# EAGLE board imu_can (EAGLE 4.11)
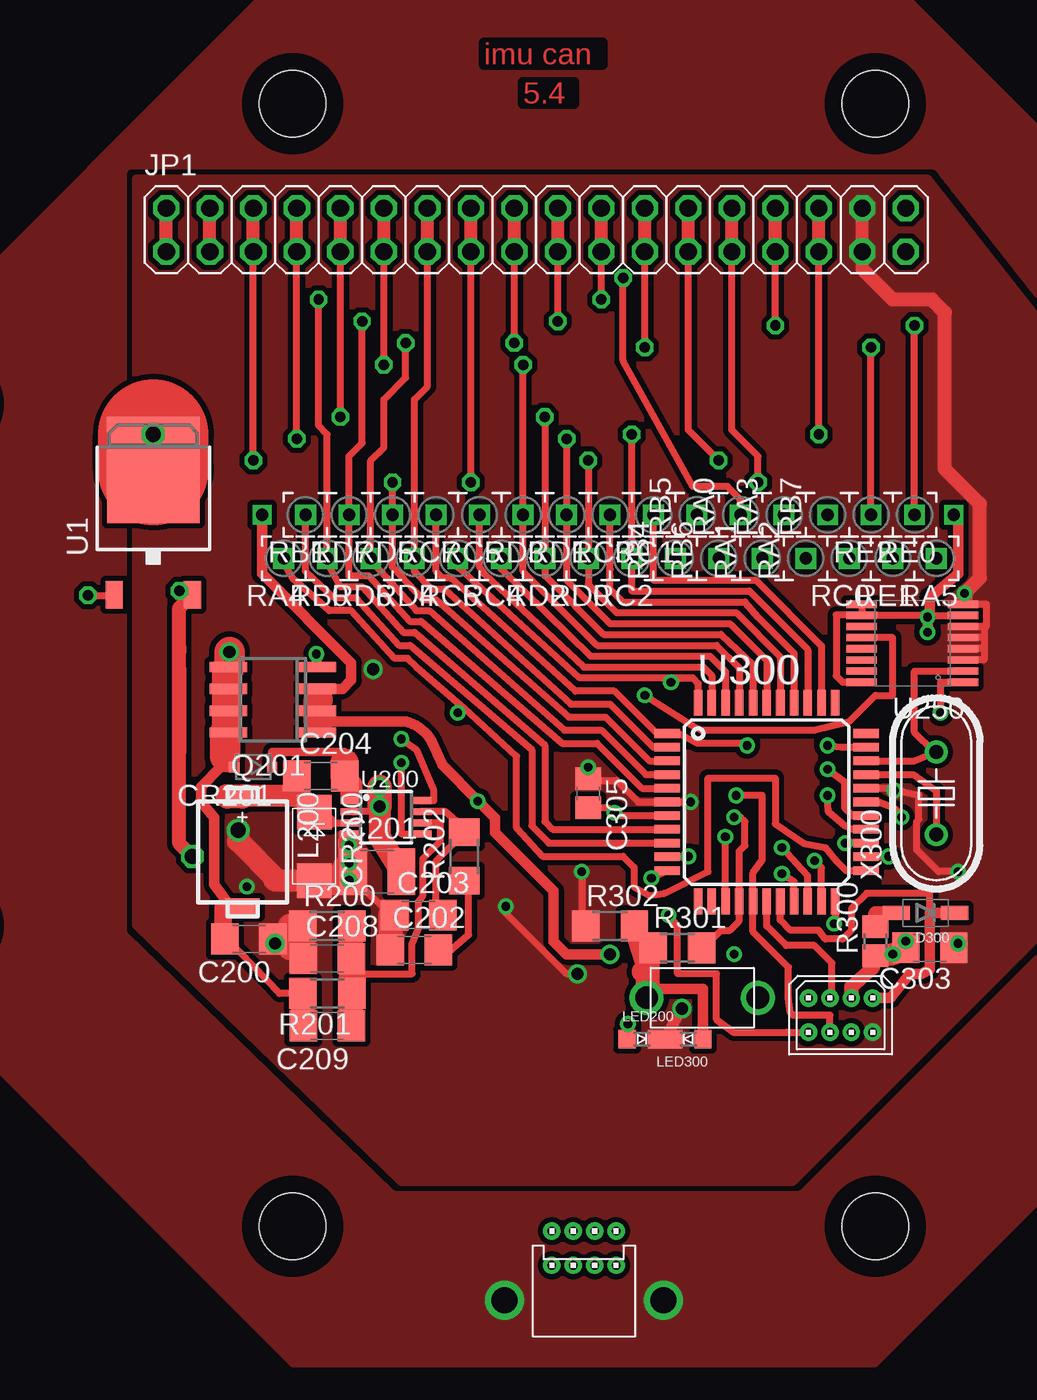
[diagram p0: board, top side]
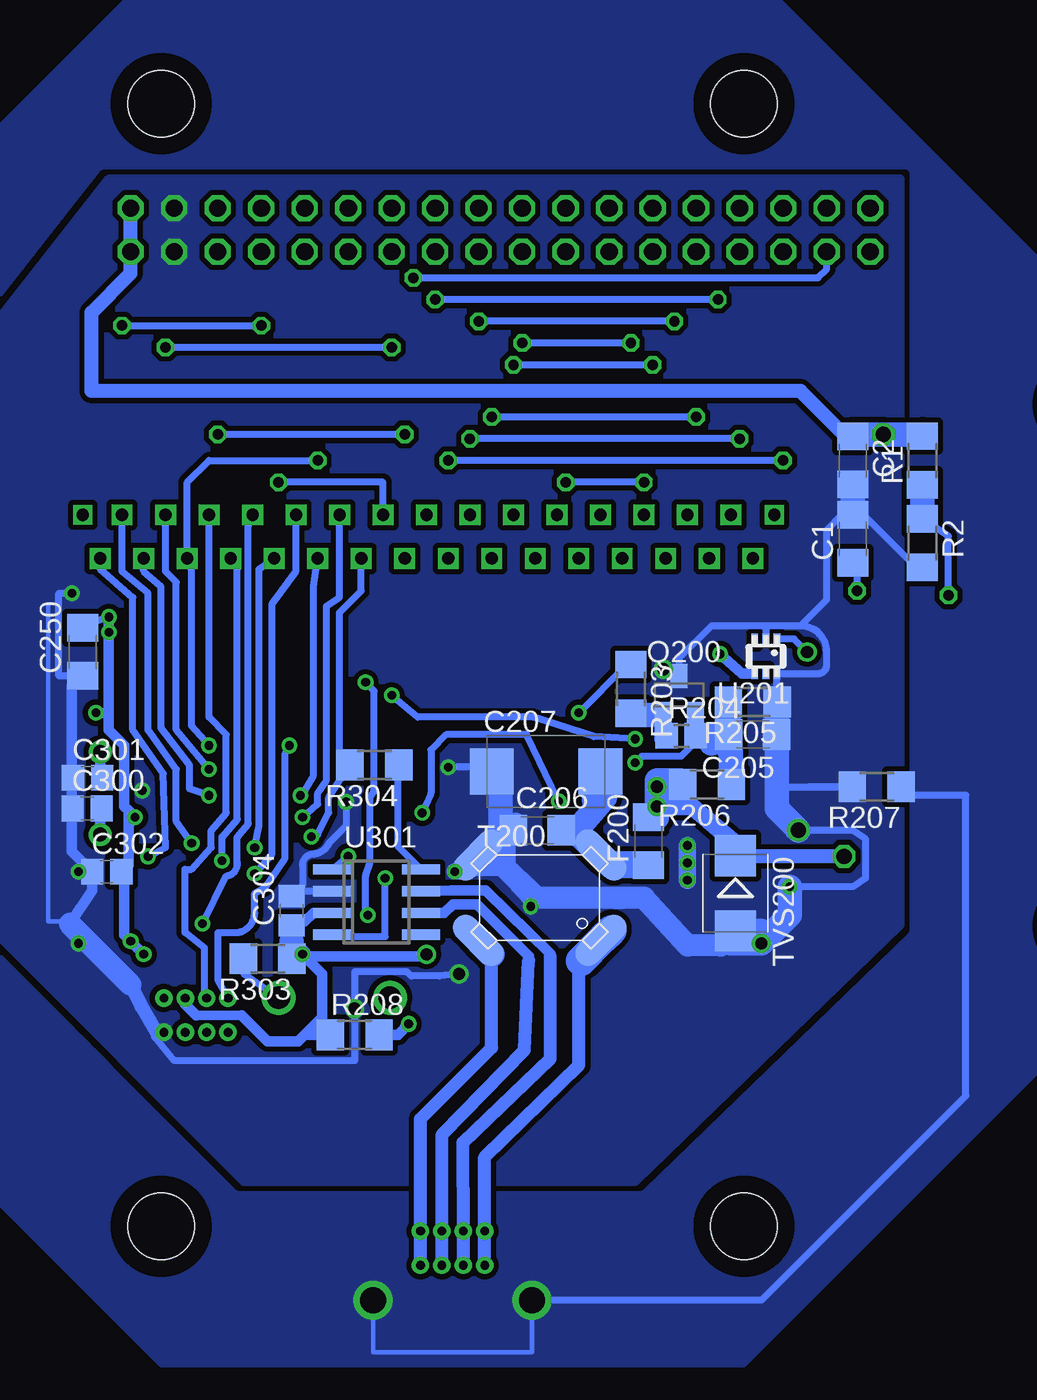
[diagram p1: board, bottom side, seen from below]

No outline drawn. Coordinates in mm, seen from the top.
Copper layers (1*16): Top 0.035mm / dielectric 1.5mm / Bottom 0.035mm
Design rules "LV2": minimum track width 8mil, minimum drill 20mil, track to track 8mil, track to pad 8mil, pad to pad 8mil, via to via 8mil, smd to smd 0mil, copper to edge 40mil, drill to drill 8mil, minimum pad ring 10mil, minimum via ring 8mil, stop-mask expansion 4mil, vias tented up to drill 0mil, thermal gap 10mil
Holes 3.86 mm at 24.13,73.66 58.17,73.66 58.17,8.13 24.13,8.13 77.98,56.13 4.32,56.13 4.32,25.65 77.98,25.65
bKeepout: 2 lines

## Footprints (pad centres in the part's own frame; a part is rotated, then mirrored left to right if it is on the bottom)
C1206 = smd 1.6 x 1.8: 1 -1.4,0; 2 1.4,0
C1210 = smd 1.6 x 2.7: 1 -1.4,0; 2 1.4,0
D/7343-31R = smd 2.55 x 2.7: + 3.175,0; - -3.175,0
C0805 = smd 1.3 x 1.5: 1 -0.85,0; 2 0.85,0
JST-08R-JED = drill 0.508 pad 1.016 round: 1 1.875,1; 2 1.875,-1; 3 0.625,1; 4 0.625,-1; 5 -0.625,1; 6 -0.625,-1; 7 -1.875,1; 8 -1.875,-1
CAN_NODE = drill 0.508 pad 1.016 round: B+@1 2,1.875; B+@2 0,1.875; B-@7 2,-1.875; B-@8 0,-1.875; CANH@3 2,0.625; CANH@4 0,0.625; CANL@5 2,-0.625; CANL@6 0,-0.625 | drill 1.511 round: CHASSIS@1 -2.032,4.636; CHASSIS@2 -2.032,-4.636
NMINIP2-J1 = smd 2 x 2: A 2,0; C -2,0
SOD323-R = smd 0.6 x 0.6: A 1.1,0; C -1.1,0
SOD-123-DIODE = smd 1.6 x 0.8: 1(CATHODE) -1.7,0; 2(ANODE) 1.7,0
1206 = smd 1.6 x 1.8: 1 -1.4,0; 2 1.4,0
2X18 = drill 1.016 octagon: 1 -21.59,-1.27; 2 -21.59,1.27; 3 -19.05,-1.27; 4 -19.05,1.27; 5 -16.51,-1.27; 6 -16.51,1.27; 7 -13.97,-1.27; 8 -13.97,1.27; 9 -11.43,-1.27; 10 -11.43,1.27; 11 -8.89,-1.27; 12 -8.89,1.27; 13 -6.35,-1.27; 14 -6.35,1.27; 15 -3.81,-1.27; 16 -3.81,1.27; 17 -1.27,-1.27; 18 -1.27,1.27; 19 1.27,-1.27; 20 1.27,1.27; 21 3.81,-1.27; 22 3.81,1.27; 23 6.35,-1.27; 24 6.35,1.27; 25 8.89,-1.27; 26 8.89,1.27; 27 11.43,-1.27; 28 11.43,1.27; 29 13.97,-1.27; 30 13.97,1.27; 31 16.51,-1.27; 32 16.51,1.27; 33 19.05,-1.27; 34 19.05,1.27; 35 21.59,-1.27; 36 21.59,1.27
MP2A = smd 1.05 x 2: P1 -3.225,0; P2 3.225,0
0603-DIODE = smd 1 x 1.1: A -0.85,0; K 0.85,0
SOT23 = smd 1 x 1.4: 1 -0.95,-1.1; 2 0.95,-1.1; 3 0,1.1
SO8 = smd 0.6 x 2.2: 1 -1.905,-2.6; 2 -0.635,-2.6; 3 0.635,-2.6; 4 1.905,-2.6; 5 1.905,2.6; 6 0.635,2.6; 7 -0.635,2.6; 8 -1.905,2.6
R1206 = smd 1.6 x 1.803: 1 -1.422,0; 2 1.422,0
R0805 = smd 1.3 x 1.5: 1 -0.85,0; 2 0.85,0
PAD_SQUARE_APC-FREE_0.1/028 = drill 0.711 pad 1.168 square: PAD 0,0
SW_6X3.5MM = drill 1.321 round: 1 -3.25,0; 2 3.25,0
CMS1 = smd 3.63 x 1.5 rotated 45: 1 3.58,-2.5; 3 -3.58,2.5 | smd 3.63 x 1.5 rotated 135: 2 3.58,2.5; 4 -3.58,-2.5
SMB = smd 2.4 x 2.4: A 2.2,0; C -2.2,0
TO-252 = smd 1 x 1.6: 1 -2.28,-4.8; 3 2.28,-4.8 | smd 5.4 x 6.2: 2 0,2.5
MSOP8 = smd 0.4 x 1.2: 1 -0.975,-2.05; 2 -0.325,-2.05; 3 0.325,-2.05; 4 0.975,-2.05; 5 0.975,2.05; 6 0.325,2.05; 7 -0.325,2.05; 8 -0.975,2.05
SC70-6 = smd 0.4 x 0.75: 1 -0.65,-0.95; 2 0,-0.95; 3 0.65,-0.95; 4 0.65,0.95; 5 0,0.95; 6 -0.65,0.95
TSSOP-16 = smd 0.42 x 1.78: 1 -2.275,-2.97; 2 -1.625,-2.97; 3 -0.975,-2.97; 4 -0.325,-2.97; 5 0.325,-2.97; 6 0.975,-2.97; 7 1.625,-2.97; 8 2.275,-2.97; 9 2.275,2.97; 10 1.625,2.97; 11 0.975,2.97; 12 0.325,2.97; 13 -0.325,2.97; 14 -0.975,2.97; 15 -1.625,2.97; 16 -2.275,2.97
TQFP44 = smd 1.5 x 0.5: 1 -5.8,4; 2 -5.8,3.2; 3 -5.8,2.4; 4 -5.8,1.6; 5 -5.8,0.8; 6 -5.8,0; 7 -5.8,-0.8; 8 -5.8,-1.6; 9 -5.8,-2.4; 10 -5.8,-3.2; 11 -5.8,-4; 23 5.8,-4; 24 5.8,-3.2; 25 5.8,-2.4; 26 5.8,-1.6; 27 5.8,-0.8; 28 5.8,0; 29 5.8,0.8; 30 5.8,1.6; 31 5.8,2.4; 32 5.8,3.2; 33 5.8,4 | smd 0.5 x 1.5: 12 -4,-5.8; 13 -3.2,-5.8; 14 -2.4,-5.8; 15 -1.6,-5.8; 16 -0.8,-5.8; 17 0,-5.8; 18 0.8,-5.8; 19 1.6,-5.8; 20 2.4,-5.8; 21 3.2,-5.8; 22 4,-5.8; 34 4,5.8; 35 3.2,5.8; 36 2.4,5.8; 37 1.6,5.8; 38 0.8,5.8; 39 0,5.8; 40 -0.8,5.8; 41 -1.6,5.8; 42 -2.4,5.8; 43 -3.2,5.8; 44 -4,5.8
HC49U70 = drill 0.813 round: 1 -2.413,0; 2 2.413,0

## Placement (x,y rotation side)
C1  .1  [C1206]  17.78,48.26 90 bottom
C2  1  [C1206]  17.78,52.83 270 bottom
C200  22  [C1206]  21.59,24.89 180 top
C201  10  [C1210]  29.08,28.83 0 top
C202  470pF  [C1206]  31.24,24.26 0 top
C203  np  [C1206]  31.5,26.29 0 top
C204  0.1  [C1206]  25.78,34.42 0 top
C205  .1  [C1206]  23.62,36.83 180 bottom
C206  .33  [C1206]  36.2,31.24 0 bottom
C207  22  [D/7343-31R]  35.69,34.67 0 bottom
C208  10pF  [C1206]  26.16,23.75 0 top
C209  120pF  [C1206]  26.16,19.81 180 top
C250  .1  [C1206]  62.74,41.66 90 bottom
C300  27pF  [C0805]  62.48,32.51 0 bottom
C301  27pF  [C0805]  62.46,34.32 0 bottom
C302  .1  [C0805]  61.34,28.83 0 bottom
C303  .1  [C1206]  61.34,24.38 180 top
C304  .1  [C0805]  50.55,26.54 90 bottom
C305  .1  [C0805]  41.4,33.4 270 top
CF300  ICD  [JST-08R-JED]  56.13,20.45 0 top
CM200  CAN  [CAN_NODE]  41.15,5.84 90 top
CR200  MA2Q705  [NMINIP2-J1]  25.4,30.3 270 top
CR201  1N4448HWS  [SOD323-R]  21.84,34.92 180 top
D300  1N4148  [SOD-123-DIODE]  61.09,26.42 180 top
F200  1A  [1206]  29.72,30.61 90 bottom
JP1  [2X18]  38.35,66.29 0 top
L200  47uH  [MP2A]  21.21,29.97 270 top
LED200  LED-GRN-  [0603-DIODE]  44.53,19.05 0 top
LED300  LED-RED-0603  [0603-DIODE]  47.24,19.05 180 top
Q200  '3906  [SOT23]  27.92,39.14 0 bottom
Q201  TPC8009  [SO8]  22.99,38.86 90 top
R1  475  [R1206]  13.72,52.83 90 bottom
R2  2.55k  [R1206]  13.72,48.01 270 bottom
R200  10k  [R1206]  26.16,25.65 0 top
R201  29.4k  [R1206]  26.16,21.72 180 top
R202  10k  [R1206]  34.16,29.72 90 top
R203  10k  [R1206]  30.73,39.5 270 bottom
R204  100k  [R0805]  27.8,36.75 0 bottom
R205  10.0k  [R1206]  23.62,38.73 180 bottom
R206  60.4k  [R1206]  26.29,33.91 180 bottom
R207  100k  [R1206]  16.38,33.78 180 bottom
R208  1.8k  [R1206]  46.86,19.3 0 bottom
R300  1k  [R0805]  58.17,24.77 90 top
R301  750  [R1206]  46.61,24.38 0 top
R302  47.5k  [R1206]  42.67,25.65 0 top
R303  1.8k  [R1206]  51.94,23.75 180 bottom
R304  ???  [R1206]  45.72,35.05 180 bottom
RA0  t19  [PAD_SQUARE_APC-FREE_0.1/028]  50.29,49.66 90 top
RA1  t20  [PAD_SQUARE_APC-FREE_0.1/028]  51.56,47.12 90 top
RA2  t21  [PAD_SQUARE_APC-FREE_0.1/028]  54.1,47.12 90 top
RA3  t22  [PAD_SQUARE_APC-FREE_0.1/028]  52.83,49.66 90 top
RA4  T23  [PAD_SQUARE_APC-FREE_0.1/028]  23.62,47.12 180 top
RA5  t24  [PAD_SQUARE_APC-FREE_0.1/028]  61.72,47.12 180 top
RB0  t8  [PAD_SQUARE_APC-FREE_0.1/028]  26.16,47.12 180 top
RB1  t9  [PAD_SQUARE_APC-FREE_0.1/028]  24.89,49.66 180 top
RB4  t14  [PAD_SQUARE_APC-FREE_0.1/028]  46.48,47.12 90 top
RB5  t15  [PAD_SQUARE_APC-FREE_0.1/028]  47.75,49.66 90 top
RB6  t16  [PAD_SQUARE_APC-FREE_0.1/028]  49.02,47.12 90 top
RB7  t17  [PAD_SQUARE_APC-FREE_0.1/028]  55.37,49.66 90 top
RC0  t32  [PAD_SQUARE_APC-FREE_0.1/028]  56.64,47.12 180 top
RC1  t35  [PAD_SQUARE_APC-FREE_0.1/028]  45.21,49.66 180 top
RC2  t36  [PAD_SQUARE_APC-FREE_0.1/028]  43.94,47.12 180 top
RC3  t37  [PAD_SQUARE_APC-FREE_0.1/028]  42.67,49.66 180 top
RC4  t42  [PAD_SQUARE_APC-FREE_0.1/028]  36.32,47.12 180 top
RC5  t43  [PAD_SQUARE_APC-FREE_0.1/028]  35.05,49.66 180 top
RC6  t44  [PAD_SQUARE_APC-FREE_0.1/028]  33.78,47.12 180 top
RC7  t1  [PAD_SQUARE_APC-FREE_0.1/028]  32.51,49.66 180 top
RD0  t38  [PAD_SQUARE_APC-FREE_0.1/028]  41.4,47.12 180 top
RD1  t39  [PAD_SQUARE_APC-FREE_0.1/028]  40.13,49.66 180 top
RD2  t40  [PAD_SQUARE_APC-FREE_0.1/028]  38.86,47.12 180 top
RD3  t41  [PAD_SQUARE_APC-FREE_0.1/028]  37.59,49.66 180 top
RD4  t2  [PAD_SQUARE_APC-FREE_0.1/028]  31.24,47.12 180 top
RD5  t3  [PAD_SQUARE_APC-FREE_0.1/028]  29.97,49.66 180 top
RD6  t4  [PAD_SQUARE_APC-FREE_0.1/028]  28.7,47.12 180 top
RD7  t5  [PAD_SQUARE_APC-FREE_0.1/028]  27.43,49.66 180 top
RE0  t25  [PAD_SQUARE_APC-FREE_0.1/028]  60.45,49.66 180 top
RE1  t26  [PAD_SQUARE_APC-FREE_0.1/028]  59.18,47.12 180 top
RE2  t27  [PAD_SQUARE_APC-FREE_0.1/028]  57.91,49.66 180 top
SW300  SW_MOMENTARY-6X3.5MM  [SW_6X3.5MM]  48.06,21.46 180 top
T200  CMS1  [CMS1]  36.07,27.3 0 bottom
TVS200  SMBJ18A  [SMB]  24.64,27.56 270 bottom
U1  LM317MDT  [TO-252]  16,49.78 0 top
U200  LT1767EMS8  [MSOP8]  29.59,32 270 top
U201  MAX4841  [SC70-6]  22.86,41.4 180 bottom
U250  HC161  [TSSOP-16]  60.33,42.16 90 top
U300  PIC18F458  [TQFP44]  51.82,32.89 0 top
U301  CANBUS  [SO8]  45.59,27.05 270 bottom
X300  10MHz  [HC49U70]  61.72,33.4 90 top

## Library data of the parts
C1 C2 C207 C300-C305 R1 R2 R200-R208 R300-R304 = rcl
C200-C206 C208 C209 C250 = discrete-smd-ipc
CF300 CM200 D300 L200 LED200 LED300 Q201 RA0 RA1-RA5 RB0 RB1 RB4-RB7 RC0 RC1-RC7 RD0 RD1-RD7 RE0 RE1 RE2 SW300 T200 U201 U250 U300 U301 = psas_eagle_library
CR200 F200 = custom
CR201 TVS200 = diode
JP1 = pinhead
Q200 = semicon-smd-ipc
U1 = mylib
U200 = custom-linear-technology
X300 = crystal

## Nets
ADJ: R1.1 R2.1 U1.1
B+: CM200.B+@1 CM200.B+@2 T200.1
B-: CM200.B-@7 CM200.B-@8 T200.4
BIN: C206.2 C207.+ F200.1 T200.2
BOOST: C204.2 CR201.C U200.1
CAN_RS: R304.1 U301.8
CANH: CM200.CANH@3 CM200.CANH@4 U301.7
CANL: CM200.CANL@5 CM200.CANL@6 U301.6
CHASSIS: CM200.CHASSIS@1 CM200.CHASSIS@2 R207.1
D0: JP1.5 JP1.6 RD0.PAD U300.38
D1: JP1.7 JP1.8 RD1.PAD U300.39
D2: JP1.9 JP1.10 RD2.PAD U300.40
D3: JP1.11 JP1.12 RD3.PAD U300.41
D4: JP1.13 JP1.14 RD4.PAD U300.2
D5: JP1.15 JP1.16 RD5.PAD U300.3
D6: JP1.17 JP1.18 RD6.PAD U300.4
D7: JP1.19 JP1.20 RD7.PAD U300.5
FB: C208.2 C209.1 R200.2 R201.1 U200.6
GND: C1.2 C2.2 C200.1 C201.1 C202.1 C203.1 C205.1 C206.1 C207.- C208.1 C250.1 C300.1 C301.1 C302.1 C303.1 C304.2 C305.1 CF300.2 CR200.A JP1.33 JP1.34 LED200.K LED300.K Q200.3 R2.2 R200.1 R205.1 R207.2 R302.1 T200.3 TVS200.A U200.4 U201.2 U201.6 U250.3 U250.4 U250.5 U250.6 U250.8 U300.6 U300.29 U301.2
LED200_A: LED200.A R208.2
NC: JP1.1 JP1.2
PIC_CANRX: U300.11 U301.4
PIC_CANTX: U300.10 U301.1
PIC_CLKIN: C300.2 U300.30 X300.1
PIC_CLKOUT/10MHZ: C301.2 U250.2 U300.31 X300.2
PIC_LAMP: LED300.A R301.1 R302.2 SW300.2
PIC_MCLR/VPP: CF300.1 D300.1(CATHODE) U300.18
PIC_PWR: C250.2 C302.2 C303.2 C304.1 C305.2 CF300.3 R208.1 R300.1 R303.1 U250.1 U250.7 U250.9 U250.10 U250.16 U300.7 U300.28 U301.3
PIC_RA1/AN1: RA1.PAD U300.20
PIC_RA2/AN2: RA2.PAD U300.21
PIC_RA3/AN3: RA3.PAD U300.22
PIC_RA4/SPS_OFF\: R203.1 RA4.PAD U300.23
PIC_RA5/AN4: RA5.PAD U300.24
PIC_RB1/INT1: RB1.PAD U300.9
PIC_RB4/CAN_RS: R304.2 RB4.PAD U300.14
PIC_RB5: R301.2 RB5.PAD U300.15
PIC_RB6: CF300.6 RB6.PAD U300.16
PIC_RB7: CF300.5 RB7.PAD U300.17
PIC_RC3/SCL: RC3.PAD U300.37
PIC_RC4/SDI: RC4.PAD U300.42
PIC_RC5/SDO: RC5.PAD U300.43
PIC_RC6/TX: CF300.8 RC6.PAD U300.44
PIC_RC7/RX: CF300.7 RC7.PAD U300.1
PIC_RE1/AN6: RE1.PAD U300.26
Q201_B: Q200.1 R203.2 R204.1
Q201_GATE: Q201.4 U201.4
RA0_IMUTEMP: JP1.3 JP1.4 RA0.PAD U300.19
RB0_ADC-INT\: JP1.21 JP1.22 RB0.PAD U300.8
RC0_RD\: JP1.25 JP1.26 RC0.PAD U300.32
RC1_WR\: JP1.27 JP1.28 RC1.PAD U300.35
RC2_TEST: JP1.31 JP1.32 RC2.PAD U300.36
RE0_ADC-CS\: JP1.29 JP1.30 RE0.PAD U300.25
RE2_HB/ALE: JP1.23 JP1.24 RE2.PAD U300.27
SHDN\: C205.2 Q200.2 R204.2 R205.2 R206.1 U200.5
SPS: Q201.1 Q201.2 Q201.3
SPS_BUCK_OUT: C200.2 C209.2 CR201.A L200.P2 Q201.5 Q201.6 Q201.7 Q201.8 R201.2 U201.1
SPS_SYNC: U200.8 U250.12
SW_PWR: R303.2 SW300.1
SYNC_QD: U250.11
V_IMU: C2.1 JP1.35 JP1.36 R1.2 U1.2
VC: C203.2 R202.2 U200.7
VC_FLT: C202.2 R202.1
VIN: C1.1 C201.2 F200.2 R206.2 TVS200.C U1.3 U200.2
VPP_PULLUP: D300.2(ANODE) R300.2
VSW: C204.1 CR200.C L200.P1 U200.3

## Tracks (layer width: path | path; a pad name or v marks a point on that pad's centre or on a via)
ADJ  (via drill 0.61)
  Top 0.406: U1.1 13.72,44.96 v12.19,44.96
  Bottom 0.406: R2.1 12.19,48.41 v12.19,44.96
  Bottom 1.422: R2.1 R1.1
B+
  Bottom 0.762: 33.78,23.37 33.78,17.53 39.27,12.16 CM200.B+@1 39.27,5.94 39.37,5.84 CM200.B+@2
  Bottom 1.016: 33.78,23.37 33.66,23.5 33.66,23.62
  Bottom 1.778: 33.66,23.62 32.38,24.89 | 32.38,24.89 T200.1 | 32.38,24.89 31.88,25.4
B-
  Bottom 0.406: T200.4 39.65,24.84 40.36,25.5
  Bottom 0.762: 38.86,24 38.86,18.54 43.02,14.38 CM200.B-@7 43.02,5.94 42.93,5.84 CM200.B-@8
  Bottom 1.524: 38.86,24 arc0 40.36,25.5
BIN
  Bottom 0.406: T200.2 32.59,29.67 32.64,29.72 32.64,29.67
  Bottom 1.422: C206.2 34.04,31.24 | 32.36,29.69 32.38,29.72 | 32.36,29.69 T200.2 32.36,29.62 32.38,29.59 34.04,31.24 | 31.87,29.21 32.36,29.69 | 34.04,31.24 33.91,31.24 32.26,33.15 32.89,33.02 32.89,34.67 C207.+
  Bottom 1.575: F200.1 31.87,29.21
BOOST
  Top 0.254: 27.54,33.91 27.54,34.54 C204.2
  Top 0.406: U200.1 27.54,33.91 27.56,33.91
  Top 0.508: CR201.C 22.94,35.81 27.18,35.81 27.18,35.18
  Top 1.27: 27.56,33.91 27.56,33.4
  Top 1.676: C204.2 27.18,34.54 27.18,35.18
CAN_RS
  Bottom 0.406: R304.1 44.32,35.05 44.32,30.29 U301.8
CANH
  Bottom 0.61: U301.7 42.04,27.69 41.25,27.74 39.22,27.74 35.44,24.01 35.43,23.88
  Bottom 0.762: 35.43,23.88 35.43,17.91 40.54,13.01 CM200.CANH@3 40.52,5.98 40.39,5.84 CM200.CANH@4
CANL
  Bottom 0.61: U301.6 41.66,26.42 41.12,26.9 39.73,26.9 36.69,23.87 36.7,23.62
  Bottom 0.762: 36.7,23.62 36.96,18.41 41.76,13.49 CM200.CANL@5 41.77,5.96 41.66,5.84 CM200.CANL@6
CHASSIS
  Bottom 0.254: CM200.CHASSIS@1 36.51,0.76 45.78,0.76 CM200.CHASSIS@2
  Bottom 0.406: CM200.CHASSIS@1 23.11,3.81 11.18,15.75 11.18,33.27 14.48,33.27 14.48,33.3 R207.1
  pour Bottom (isolate 0.305, rank 2, no thermals): 0.25,23.88 0.25,57.91 24.13,81.79 58.17,81.79 82.04,57.91 82.04,23.88 58.17,0 24.13,0
  pour Top (isolate 0.305, rank 2, no thermals): 0.25,57.91 24.13,81.79 58.17,81.79 82.04,57.91 82.04,23.88 58.17,0 24.13,0 0.25,23.88
D0  (via drill 0.61)
  Top 0.406: U300.38 52.62,41.36 50.04,43.94 43.05,43.94 41.4,45.59 RD0.PAD v41.4,52.83 | v21.84,52.83 JP1.5 21.59,65.28
  Top 0.762: JP1.5 JP1.6
  Bottom 0.406: v21.84,52.83 v41.4,52.83
D1  (via drill 0.61)
  Top 0.406: U300.39 51.82,41.15 49.66,43.31 42.67,43.31 40.13,45.85 RD1.PAD v40.13,54.1 | v24.38,54.1 JP1.7
  Top 0.762: JP1.7 JP1.8
  Bottom 0.406: v24.38,54.1 v40.13,54.1
D2  (via drill 0.61)
  Top 0.406: U300.40 51.02,40.93 49.15,42.67 42.29,42.67 38.86,46.1 RD2.PAD v38.86,55.37 | v26.92,55.37 JP1.9
  Top 0.762: JP1.9 JP1.10
  Bottom 0.406: v26.92,55.37 v38.86,55.37
D3  (via drill 0.61)
  Top 0.406: U300.41 50.22,40.72 48.9,42.04 41.91,42.04 37.59,46.35 RD3.PAD v37.59,58.42 | v29.46,58.42 JP1.11
  Top 0.762: JP1.11 JP1.12
  Bottom 0.406: v37.59,58.42 v29.46,58.42
D4
  Top 0.406: U300.2 45.19,36.09 42.67,38.61 40.39,38.61 33.02,45.34 32.26,45.34 31.24,46.35 RD4.PAD 31.24,56.39 32,57.15 JP1.13
  Top 0.762: JP1.13 JP1.14
D5  (via drill 0.61)
  Top 0.406: U300.3 44.97,35.29 42.42,37.85 40.26,37.85 32.51,44.7 31.75,44.7 29.97,46.61 RD5.PAD v29.97,51.56 | v34.54,51.56 JP1.15
  Top 0.762: JP1.15 JP1.16
  Bottom 0.406: v29.97,51.56 v34.54,51.56
D6  (via drill 0.61)
  Top 0.406: U300.4 44.76,34.49 42.16,37.08 40.01,37.08 32.13,44.07 31.37,44.07 28.96,46.74 RD6.PAD 28.7,52.83 29.46,53.59 29.46,56.39 30.73,57.66 v30.73,59.69 | v37.08,59.69 JP1.17 37.34,65.28
  Top 0.762: JP1.17 JP1.18
  Bottom 0.406: v30.73,59.69 v37.08,59.69
D7  (via drill 0.61)
  Top 0.406: U300.5 44.54,33.69 41.91,36.32 39.88,36.32 31.62,43.43 30.99,43.43 28.57,46.1 27.43,46.1 RD7.PAD 27.43,53.09 28.19,53.85 v28.19,60.96 | v39.62,60.96 JP1.19
  Top 0.762: JP1.20 JP1.19 39.88,64.77
  Bottom 0.406: v28.19,60.96 v39.62,60.96
FB
  Top 0.406: C209.1 | 27.56,26.16 27.56,26.06 R200.2 | U200.6 32.77,31.68 32.77,30.61 31.75,29.59 31.75,27.43 31.5,27.05 31.5,25.53 31.11,24.64 31.11,22.86 27.81,22.86 27.69,23.24 27.56,23.24
  Top 1.422: R200.2 27.56,25.63 C208.2 27.56,23.24 27.56,21.72 R201.1 27.56,21.69 C209.1
GND  (via drill 0.51, 0.71, 0.89)
  Top 0.254: 27.3,28.96 27.43,29.08 | U200.4 27.45,31.11 26.92,31.11 26.92,30.86 27.18,30.61 27.43,30.61
  Top 0.406: 23.08,28.35 CR200.A | v41.4,34.92 C305.1 41.4,34.16 43.05,34.16 44.32,32.89 U300.6 v47.37,32.89 | v59.27,33.57 60.71,33.27 60.71,31.88 60.58,31.75 60.58,30.1 61.85,28.83 v62.99,28.83 | C203.1 29.84,26.29 27.81,28.32 v27.43,28.32 | C200.1 22.86,24.89 v23.11,24.64 | v40.77,22.86 40.13,22.86 36.58,26.42 v36.58,26.8 36.58,26.92 | R302.1 41.02,25.88 v41.02,28.83 | v59.27,33.57 59.56,33.53 | U300.29 59.4,33.69 v59.27,33.57 | C303.1 v62.99,24.64 | 64.52,42.49 U250.5 | 64.52,41.84 U250.4 | U250.3 64.52,41.19 64.52,41.84 | 64.52,42.49 64.52,41.84 | 64.52,42.49 64.52,43.14 U250.6 64.64,43.14 64.64,44.45 U250.8 63.3,45.01 v63.37,45.09 | 63.37,44.7 63.3,44.63
  Top 0.61: 27.3,28.35 27.3,28.32 | 27.3,28.32 v27.43,28.32 | 27.3,28.32 27.43,28.19 | LED300.K 45.89,19.09 v46.86,20.83
  Top 0.762: JP1.34 JP1.33 57.4,64.01
  Top 0.813: v63.37,45.09 64.26,45.97 64.26,50.29 62.23,52.32 62.23,61.47 61.47,62.23 59.18,62.23 57.4,64.01
  Top 0.914: v63.37,45.09 63.37,44.7
  Top 1.016: LED300.K LED200.K
  Top 1.27: C201.1 27.43,29.08 v27.43,29.34 v27.43,30.35 27.43,30.61 | 23.08,28.35 23.08,28.32 23.24,28.32 | 23.24,28.32 24.64,28.32 | 23.24,28.32 20.95,30.61 v20.95,31.24
  Top 1.422: 24.76,24.89 C208.1 | 24.76,24.89 24.76,25.65 | 24.76,24.89 24.77,24.89 | 24,24.89 24.76,24.89 | C200.1 24,24.89 | C202.1 29.84,26.29 | 24,24.89 24,24.38 | R200.1 24,25.65 24,24.89
  Top 1.778: CR200.A 27.3,28.35 27.3,28.96
  Bottom 0.254: 64.77,44.35 64.77,25.91 63.5,25.91 63.5,25.78
  Bottom 0.406: 38.1,31.37 38.23,31.37 | 22.22,38.73 22.23,38.73 22.23,40.45 U201.6 22.21,40.39 19.81,40.39 arc-90 19.3,40.89 19.3,41.66 arc-90 20.83,43.18 | 22.86,43.18 26.04,43.18 27.93,41.29 Q200.3 28.32,40.64 v28.83,40.64 28.96,40.64 | 22.86,42.29 U201.2 22.86,43.18 | C207.- 38.92,34.73 39.12,34.92 v41.4,34.92 | v47.37,32.89 47.37,31.5 48.39,30.48 arc64 49.28,29.84 arc-90 49.91,29.21 49.91,28.03 C304.2 50.55,27.3 50.16,27.69 U301.2 | v59.27,33.57 59.31,33.4 | 61.98,28.83 C302.1 v62.99,28.83 | 20.83,43.18 22.86,43.18 | 21.08,31.37 21.46,30.99 | v40.77,22.86 41.91,22.73 43.56,22.73 43.81,22.99 46.86,22.99 v46.86,20.83 46.86,17.78 57.4,17.78 58.55,19.18 58.29,19.45 CF300.2 | 37.97,29.08 38.04,29.02 38.35,28.7 arc4 v36.58,26.8 36.58,27.05 | 63.18,25.46 63.25,25.4 63.25,24.89 v62.99,24.64 | C250.1 64.14,40.26 64.14,45.09 v63.37,45.09 | 20.32,33.78 R207.2 22.23,33.78 22.23,32.51 | 21.08,31.24 v20.95,31.24 17.78,31.24 17.02,30.73 17.02,28.45 17.78,27.94 v21.46,27.94 | R2.2 14.07,46.58 17.27,49.78 17.78,49.78 C1.2 18.41,49.66 19.3,48.77 19.3,44.7 20.83,43.18
  Bottom 0.61: 38.35,31.37 38.1,31.37 37.72,31.37 C206.1 38.1,30.74 38.1,29.34 | 63.5,25.78 62.19,27.73 C302.1 63.37,30.01 63.37,32.51 C300.1 63.37,32.55 63.37,34.25 C301.1 63.37,34.38 63.37,39.62 C250.1
  Bottom 0.813: 59.94,22.23 59.31,20.95 58.42,19.43 58.02,19.43 CF300.2
  Bottom 0.965: v41.02,28.83 40.39,28.83 40.01,29.21
  Bottom 1.016: v27.43,28.32 v27.43,30.35 | 38.1,29.08 40.01,29.08 40.01,29.21 40.01,29.72
  Bottom 1.27: 37.85,31.24 37.97,31.11 | C206.1 37.85,31.24 | 37.85,31.24 37.47,31.62 | 59.94,22.23 63.18,25.46 63.5,25.78 | 31.75,27.3 36.2,27.3 38.04,29.02 38.1,29.08 38.1,29.34 38.1,30.76 | 31.75,27.3 29.97,27.3 27.43,24.51 25.49,24.51 TVS200.A | 31.75,27.3 31.11,27.3
  Bottom 1.422: T200.3 38.2,31.24 C206.1 | C205.1 22.23,36.96 | R205.1 22.23,38.73 22.23,36.96 | v20.95,31.24 21.08,31.37 22.23,32.51 22.23,36.96 | v21.46,27.94 21.46,26.29 v23.11,24.64 | v23.11,24.64 24.89,24.64 | TVS200.A 23.11,25.36 v23.11,24.64 | 38.92,34.73 38.99,34.67 38.35,34.04 38.35,31.37 | C1.2 C2.2
  pour Bottom (isolate 0.305, no thermals): 14.99,69.34 14.99,25.65 30.48,10.67 53.34,10.67 67.82,25.15 67.82,60.96 61.21,69.34
  pour Top (isolate 0.305, no thermals): 14.99,69.34 61.21,69.34 67.82,60.96 67.82,25.15 53.34,10.67 30.48,10.67 14.99,25.65
LED200_A  (via drill 0.51)
  Top 0.61: LED200.A 43.56,19.05 v43.71,19.94
  Bottom 0.61: R208.2 44.32,19.3 v43.71,19.94
NC
  Top 0.762: JP1.1 JP1.2
PIC_CANRX  (via drill 0.51)
  Top 0.406: U300.11 46.02,28.87 v45.09,28.45
  Bottom 0.406: v45.09,28.45 45.09,25.02 46.99,25.02 U301.4 48.26,25.15
PIC_CANTX  (via drill 0.51)
  Top 0.406: U300.10 47.22,29.69 v47.24,29.72
  Bottom 0.406: U301.1 v47.24,29.72 47.37,29.21 47.62,29.21
PIC_CLKIN
  Top 0.406: U300.30 60.38,34.49 61.72,33.53 X300.1
  Bottom 0.61: C300.2 61.72,32.42 X300.1
PIC_CLKOUT/10MHZ
  Top 0.406: U300.31 60.47,35.29 X300.2 61.59,35.81 60.45,36.96 60.45,40.54 U250.2
  Bottom 0.61: C301.2 61.63,34.29 61.72,34.29 X300.2
PIC_LAMP
  Top 0.406: 44.7,21.46 SW300.2 44.83,21.46
  Top 0.61: LED300.A 48.09,21.97 44.83,21.97
  Top 0.813: SW300.2 44.83,21.97 45.19,21.95 R301.1
  Top 1.27: R301.1 45.34,24.38 44.81,23.47 R302.2 | 44.83,21.46 44.83,22.99 44.58,22.99
PIC_MCLR/VPP
  Top 0.406: U300.18 52.62,26 53.21,25.4 54.86,25.4 55.24,24.89 56.26,24.89 56.77,25.4 56.77,26.67 57.66,27.56 61.34,27.56 61.34,26.42
  Top 0.61: 59.04,21.45 60.17,22.86 60.83,22.86 61.34,23.11 61.34,26.42 D300.1(CATHODE) | CF300.1 59.04,21.45 | 59.04,21.45 59.05,21.46
PIC_PWR  (via drill 0.51, 0.71)
  Top 0.406: U300.28 58.29,32.89 59.31,32.51 59.56,32.26 v59.69,32 | C305.2 42.55,32.55 v42.93,32.26 43.05,32.26 | 43.05,32.26 43.05,32.38 | U300.7 43.05,32.09 43.05,32.26 | U250.10 61.21,43.79 v61.21,43.69 61.34,43.69 61.34,43.79 U250.7 | U250.1 61.98,39.89 v61.98,38.1 | 57.4,44.44 57.4,44.45 | 57.4,44.44 U250.9 | U250.10 57.4,43.79 57.4,43.81 | 57.4,43.81 57.4,44.44 | U250.16 56.25,39.89 55.88,40.26 55.88,43.81 57.4,43.81 | 57.4,43.81 57.35,43.81 U250.10 | 58.04,23.98 58.06,24 R300.1 | 62.87,49.53 v62.74,49.66 | C303.2 v59.94,24.77
  Top 0.61: v59.18,24 60.33,24.26 | v42.67,24 40.13,24 39.37,24.77 39.37,27.69 35.94,31.11 35.94,31.95 v34.95,32.94 | v34.95,32.94 34.92,32.97 | v34.95,32.94 32.89,35.05 32.26,36.45 arc46 30.73,37.59 26.29,37.59 | 61.34,43.79 61.34,44.83 62.99,46.23 62.99,49.28 62.87,49.53 | v61.21,42.8 v61.21,43.69
  Top 0.813: 56.77,22.1 58.04,23.24 58.04,23.98 | 56.77,22.1 56.76,22.09 | 56.77,22.1 56.77,22.09
  Top 0.838: CF300.3 56.77,22.1
  Top 1.27: C303.2 v59.18,24 R300.1
  Bottom 0.406: v34.95,32.94 36.83,36.83 41.53,36.83 42.42,35.94 42.42,33.4 v42.93,32.26 43.05,32.51 | C250.2 62.74,43.18 v61.21,43.69 | R303.1 50.42,23.75 v49.91,24 49.91,23.88 | 60.33,28.83 60.45,28.83 | 48.26,19.3 R208.1 48.77,19.3
  Bottom 0.508: 56.76,21.07 CF300.3
  Bottom 0.559: 53.47,20.45 56.13,20.45
  Bottom 0.61: v49.91,24 48.77,22.86 48.77,20.32 | 48.77,20.32 50.16,18.92 51.94,18.92 53.47,20.45 | 60.33,28.83 60.33,25.15 v59.18,24 | 48.77,20.32 48.77,19.3 49.53,19.3 | 56.13,20.45 56.76,21.07 | 49.91,23.88 43.05,23.88 v42.67,24 | C302.2 60.45,28.83 60.07,29.21 60.07,31.11 | 60.07,31.11 60.07,31.62 v59.69,32 60.07,32.38 | 61.21,38.1 61.21,37.08 60.33,36.2 60.33,32.64 60.07,32.38 | 61.21,38.1 v61.21,42.8 v61.21,43.69 | 61.21,38.1 v61.98,38.1 | U301.3 49.28,26.42 49.78,25.91 50.29,25.91 50.55,25.65 | 60.07,31.11 60.07,32.38
  Bottom 1.016: v49.91,24 50.42,24.51 50.55,24.51
  Bottom 1.27: 50.55,24.77 50.55,25.65 C304.1
  Bottom 1.422: 50.55,24.51 50.55,24.77
PIC_RA1/AN1  (via drill 0.51)
  Top 0.406: U300.20 54.22,28.59 v52.7,30.23
  Bottom 0.406: v52.7,30.23 52.45,31.5 52.45,46.48 RA1.PAD
PIC_RA2/AN2  (via drill 0.51)
  Top 0.406: U300.21 55.02,29.06 v54.61,29.46
  Bottom 0.406: v54.61,29.46 54.61,30.86 53.72,31.88 53.72,46.48 RA2.PAD
PIC_RA3/AN3  (via drill 0.51)
  Top 0.406: U300.22 55.82,25.84 arc-90 v55.75,25.78
  Bottom 0.406: v55.75,25.78 54.36,28.57 arc-90 53.72,29.34 53.72,30.86 53.09,31.62 53.09,49.02 RA3.PAD
PIC_RA4/SPS_OFF\  (via drill 0.51)
  Top 0.406: 34.16,38.35 37.21,35.56 37.21,31.37 38.73,29.72 43.43,29.72 44.07,29.08 44.07,27.94 44.96,27.43 45.85,27.56 48.39,28.83 48.39,34.29 52.32,34.29 52.32,31.62 53.98,30.48 55.24,30.23 55.88,29.46 56.45,28.89 U300.23 | RA4.PAD 23.62,46.86 24.13,45.97 26.29,44.07 27.56,44.07 30.1,41.27 30.86,41.27 31.37,40.77 34.16,38.35 | 34.16,38.35 v33.78,38.1
  Bottom 0.406: 30.73,40.89 R203.1 30.76,40.89 30.99,40.89 v33.78,38.1
PIC_RA5/AN4  (via drill 0.51)
  Top 0.406: U300.24 57.64,29.72 v58.93,29.72
  Bottom 0.406: v58.93,29.72 57.91,30.23 58.04,34.54 59.82,37.08 59.82,44.83 61.72,46.48 RA5.PAD
PIC_RB1/INT1
  Top 0.406: U300.9 39.1,30.49 38.1,31.5 38.1,35.94 30.99,42.04 30.35,42.04 27.81,44.83 26.54,44.83 24.89,46.35 RB1.PAD
PIC_RB4/CAN_RS  (via drill 0.51)
  Top 0.406: U300.14 49.42,30.59 v49.4,30.86
  Bottom 0.406: v49.4,30.86 49.02,30.99 48.39,32.26 48.39,33.15 47.75,34.16 47.75,34.29 | 47.75,34.29 47.75,43.94 46.48,45.21 RB4.PAD | 47.12,35.05 R304.2 47.14,34.77 47.62,34.29 47.75,34.29
PIC_RB5  (via drill 0.51)
  Top 0.406: R301.2 48.13,24.38 | 48.13,24.38 48.13,24.51 | v49.91,32 50.29,32 50.55,31.75 50.55,30.35 50.22,30.02 U300.15 50.22,25.96 49.66,25.4 49.15,25.4 48.13,24.38
  Bottom 0.406: v49.91,32 49.02,32.77 49.02,33.4 48.51,34.16 48.51,44.32 47.75,44.83 RB5.PAD
PIC_RB6  (via drill 0.51)
  Top 0.406: U300.16 51.05,27.05 | CF300.6 55.51,20.45 53.34,20.45 53.21,20.57 53.09,21.46 53.09,23.24 51.02,25.31 U300.16 | U300.16 51.02,28.74 51.56,29.5 51.56,33.27 v50.04,33.27
  Bottom 0.406: v50.04,33.27 49.78,33.53 49.28,34.42 49.28,45.47 RB6.PAD
PIC_RB7
  Top 0.406: U300.17 51.82,25.65 52.96,24.51 54.61,24.51 55.63,23.5 55.63,21.56 CF300.5
  Bottom 0.406: RB7.PAD 55.37,37.85 54.36,36.83 54.36,32.26 55.24,31.24 55.24,30.23 56.39,28.96 56.77,28.96 56.77,25.27 55.63,24.38 55.63,21.59 55.5,21.46 CF300.5
PIC_RC3/SCL
  Top 0.406: 42.67,46.1 42.67,46.48 | 42.67,46.1 RC3.PAD | U300.37 53.42,41.58 51.31,43.69 50.55,44.58 43.43,44.58 42.67,45.34 42.67,46.1
PIC_RC4/SDI
  Top 0.406: U300.42 49.42,40.5 48.51,41.4 41.53,41.4 36.32,46.48 RC4.PAD
PIC_RC5/SDO
  Top 0.406: U300.43 48.62,40.28 48.13,40.77 41.15,40.77 35.31,46.23 35.05,46.61 RC5.PAD
PIC_RC6/TX  (via drill 0.51)
  Top 0.406: 52.96,19.43 52.98,19.45 52.98,19.43 52.96,19.43 | 52.96,19.43 49.91,19.43 48.9,20.19 48.9,22.86 46.61,22.86 46.61,25.65 v46.1,26.29 | CF300.8 54.26,19.43 52.96,19.43 | RC6.PAD 33.78,46.61 40.89,40.13 47.5,40.13 | v46.23,39.88 46.23,39.62 46.74,40.13 47.5,40.13 | U300.44 47.82,39.81 47.5,40.13
  Bottom 0.406: v46.1,26.29 46.23,26.54 46.23,28.57 45.97,29.34 45.97,33.15 45.72,33.53 45.72,39.37 v46.23,39.88
PIC_RC7/RX  (via drill 0.51)
  Top 0.406: v50.67,36.2 50.29,36.32 47.75,36.32 46.67,36.89 U300.1 45.4,36.89 42.93,39.37 40.64,39.37 33.4,45.97 32.89,45.97 32.51,46.35 RC7.PAD
  Bottom 0.406: CF300.7 54.26,21.46 54.85,22.48 54.85,25.27 53.85,25.27 arc-90 52.7,26.42 52.7,27.56 52.07,27.94 50.93,29.59 50.93,35.69 v50.67,36.2
PIC_RE1/AN6  (via drill 0.51)
  Top 0.406: v55.37,33.27 55.42,32.31 56.39,31.5 56.84,31.29 U300.26
  Bottom 0.406: v55.37,33.27 56.52,33.66 56.52,35.05 58.17,37.21 58.17,45.47 59.18,46.35 RE1.PAD
Q201_B
  Bottom 1.016: R204.1 28.77,36.7 28.88,36.58 Q200.1 28.88,37.97 29.59,37.97
  Bottom 1.422: R203.2 30.73,38.1 30.61,37.97 29.59,37.97
Q201_GATE  (via drill 0.51)
  Top 0.406: 25.53,40.83 Q201.4
  Top 0.61: v25.53,41.53 25.53,40.83
  Bottom 0.406: U201.4 23.7,40.39
  Bottom 0.61: v25.53,41.53 24.26,40.39 23.7,40.39
RA0_IMUTEMP  (via drill 0.51, 0.61)
  Top 0.406: U300.19 53.42,28.25 v52.7,28.7 | RA0.PAD 50.29,50.55 49.53,51.31 47.5,51.31 43.43,58.67 v43.43,63.5
  Top 0.762: JP1.3 JP1.4
  Bottom 0.406: v52.7,28.7 51.69,29.84 51.69,44.45 50.29,46.35 RA0.PAD | v43.43,63.5 19.81,63.5 19.3,64.01 19.3,64.77 19.05,65.02 JP1.3
RB0_ADC-INT\  (via drill 0.61)
  Top 0.406: U300.8 39.32,31.29 38.86,31.75 38.86,36.2 31.24,42.8 30.61,42.8 28.19,45.47 26.92,45.47 26.04,47.12 RB0.PAD 26.16,54.36 25.65,54.86 v25.65,62.23 | v42.16,62.23 JP1.21
  Top 0.762: JP1.21 JP1.22
  Bottom 0.406: v25.65,62.23 v42.16,62.23
RC0_RD\  (via drill 0.51, 0.61)
  Top 0.406: U300.32 56.16,36.09 v55.37,36.2 | v49.02,52.83 47.24,54.61 JP1.25
  Top 0.762: JP1.25 JP1.26
  Bottom 0.406: v55.37,36.2 56.39,37.34 56.39,46.86 RC0.PAD 56.64,51.56 55.37,52.83 v49.02,52.83
RC1_WR\  (via drill 0.61)
  Top 0.406: U300.35 55.02,42.01 51.18,45.85 45.21,45.85 RC1.PAD | v51.31,51.56 51.31,53.09 49.78,54.61 JP1.27
  Top 0.762: JP1.27 JP1.28
  Bottom 0.406: v51.31,51.56 45.21,51.56 RC1.PAD
RC2_TEST  (via drill 0.61)
  Top 0.406: U300.36 54.22,41.8 50.8,45.21 43.94,45.21 | 43.94,45.21 RC2.PAD | 43.94,45.21 v43.94,54.36 | v54.86,54.36 JP1.31
  Top 0.762: JP1.31 JP1.32
  Bottom 0.406: v43.94,54.36 v54.86,54.36
RE0_ADC-CS\  (via drill 0.51, 0.61)
  Top 0.406: U300.25 56.64,30.49 v56.39,30.48 | RE0.PAD v60.45,60.71 | v52.32,60.71 JP1.29
  Top 0.762: JP1.29 JP1.30
  Bottom 0.406: v56.39,30.48 57.28,31.75 57.28,34.8 58.93,37.08 58.93,45.09 60.45,46.35 RE0.PAD | v60.45,60.71 v52.32,60.71
RE2_HB/ALE  (via drill 0.51, 0.61)
  Top 0.406: U300.27 56.81,32.09 56.39,32.51 56.39,34.04 v55.37,34.8 | RE2.PAD v57.91,59.44 | v44.7,59.44 44.7,64.77
  Top 0.508: JP1.23 44.45,65.02 44.7,64.77
  Top 0.762: JP1.23 JP1.24
  Bottom 0.406: v55.37,34.8 57.28,37.08 57.28,45.72 57.91,46.35 RE2.PAD | v57.91,59.44 v44.7,59.44
SHDN\  (via drill 0.51)
  Top 0.406: U200.5 30.48,31.03 v30.48,35.18
  Bottom 0.406: v30.48,35.18 30.1,35.56 27.81,35.56 26.92,36.45 26.92,36.83 26.98,36.83
  Bottom 0.61: 26.16,36.83 26.92,36.83
  Bottom 1.016: R204.2 26.95,36.73 arc-90 27.05,36.96 arc90 26.98,36.63 26.98,36.83 Q200.2
  Bottom 1.422: C205.2 | R205.2 25.04,36.83 C205.2 | C205.2 25.02,35.94 24.89,35.81 24.89,34.29 R206.1 | C205.2 26.16,36.83 26.04,36.32
SPS  (via drill 0.71)
  Top 0.406: Q201.1 25.59,37.52 25.65,37.59 | Q201.3 25.59,38.93 25.65,38.86
  Top 0.61: Q201.3 27.05,39.5 27.56,40.01 27.56,41.02 22.35,46.23 v22.35,49.66
  Top 1.676: 25.65,37.59 25.59,37.66 Q201.2 25.59,38.8 25.65,38.86
SPS_BUCK_OUT  (via drill 0.71)
  Top 0.406: 20.32,40.7 Q201.5 | 20.32,38.29 Q201.7 20.32,38.16 | 20.32,39.43 Q201.6 | C200.2 20.32,24.89 23.37,21.72 R201.2 24.89,21.72 | 20.64,26.62 20.7,26.62 20.7,26.75 L200.P2
  Top 0.61: 19.94,34.92 CR201.A | 19.94,34.92 18.8,33.78 18.8,32.89 19.56,32 19.56,28.07 20.64,26.62 20.7,26.54 | 20.19,35.56 19.94,35.56 19.94,34.92
  Top 1.016: C200.2 20.07,24.89 20.07,26.75 L200.P2
  Top 1.422: R201.2 24.77,21.72 24.76,21.71 C209.2
  Top 1.778: Q201.5 20.45,40.77 v20.45,41.66 | Q201.6 20.32,39.5 20.32,40.7 | Q201.7 20.32,38.23 20.32,39.43 | 20.32,36.96 Q201.8 | 20.32,36.96 20.32,38.16 | 20.32,36.96 20.19,36.96 20.19,35.56
  Bottom 0.406: v20.45,41.66 21.21,42.42 22.21,42.42 U201.1
SPS_SYNC  (via drill 0.51)
  Top 0.406: U250.12 59.18,42.49 59.18,39.12 58.17,39.12 56.64,37.59 54.61,37.08 48.01,37.08 47.5,37.34 v44.7,39.12 | U200.8 32.38,32.98 32.38,33.53 31.37,35.94 v30.48,36.58
  Bottom 0.406: v44.7,39.12 43.18,37.85 36.45,37.85 32.89,36.7 v30.48,36.58
SW_PWR
  Bottom 0.406: SW300.1 53.34,22.86 53.34,24.38 R303.2
V_IMU  (via drill 0.89)
  Top 6.452: U1.2 v16,54.36
  Bottom 0.813: JP1.36 59.94,65.28 60.2,65.02 JP1.35 59.94,63.75 62.23,61.47 62.23,56.9 20.83,56.9 18.29,54.36 17.78,54.36
  Bottom 1.422: R1.2 13.72,54.36 v16,54.36 17.78,54.36 C2.1
VC
  Top 0.406: C203.2 32.51,26.55 32.51,29.46 34.16,31.11 R202.2 34.16,31.37 33.08,32.33 U200.7
VC_FLT
  Top 0.406: C202.2 33.27,24.13 34.42,25.15 34.42,27.69 34.16,27.94 R202.1
VIN  (via drill 0.61, 0.71, 0.89)
  Top 0.406: 29.21,32.33 U200.2 | 18.14,44.85 18.03,44.96 17.78,44.96 v17.53,45.21
  Top 0.813: 17.53,40.64 17.53,35.81 | 17.53,40.64 17.53,41.66 | 17.53,41.66 17.53,41.91 | v18.29,29.72 17.53,30.48 17.53,40.64 | U1.3 18.14,44.85 17.53,44.23 17.53,41.66
  Top 1.27: C201.2 29.21,30.86 29.21,32.33 v29.21,32.64
  Top 1.422: v29.21,32.64 v29.21,33.78
  Bottom 0.406: C1.1 17.53,46.61 v17.53,45.21
  Bottom 0.813: TVS200.C 24.6,29.72 v18.29,29.72
  Bottom 1.016: TVS200.C 24.64,30.48 27.18,32.64 v29.21,32.64
  Bottom 1.422: F200.2 29.21,32 v29.21,32.64 v29.21,33.78 29.21,34.16 27.84,34.16 R206.2
VPP_PULLUP
  Top 0.813: R300.2 58.17,26.42 D300.2(ANODE)
VSW
  Top 0.254: L200.P1 21.21,33.27 21.21,33.15
  Top 0.406: CR200.C 25.4,32.38 26.11,31.68 U200.3
  Top 0.813: CR200.C 26,31.75 26.29,31.75
  Top 1.27: 25.4,32.38 24.38,33.4 24.38,34.54 | L200.P1 20.27,33.27 21.21,33.27 24.38,33.27 24.38,34.54 | 24.38,34.54 C204.1 | 21.21,33.15 20.32,33.15

## Text on the board
Top: imu can | 5.4